# Altium PCB lab2_larionov_buck.PcbDoc
Units mm, origin at the board's own origin, x right, y up, seen from the top; angles counter-clockwise.
Board outline 72.5 x 30 mm, 2 copper layers (Top Layer, Bottom Layer), stack 1.57 mm thick; 36 components, 21 nets, 107 pads, 288 vias.
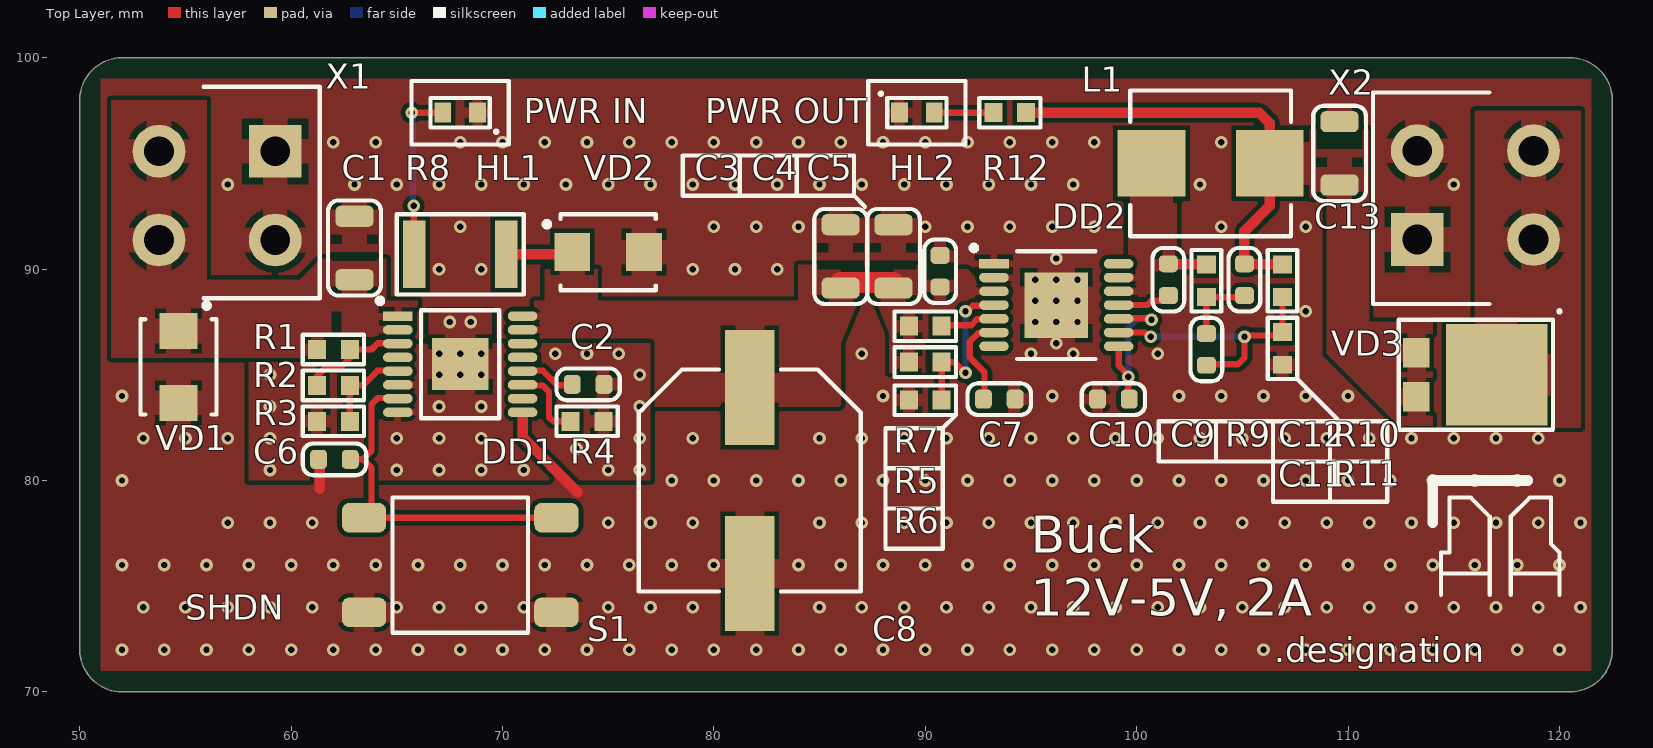
[diagram p0: Top Layer view]
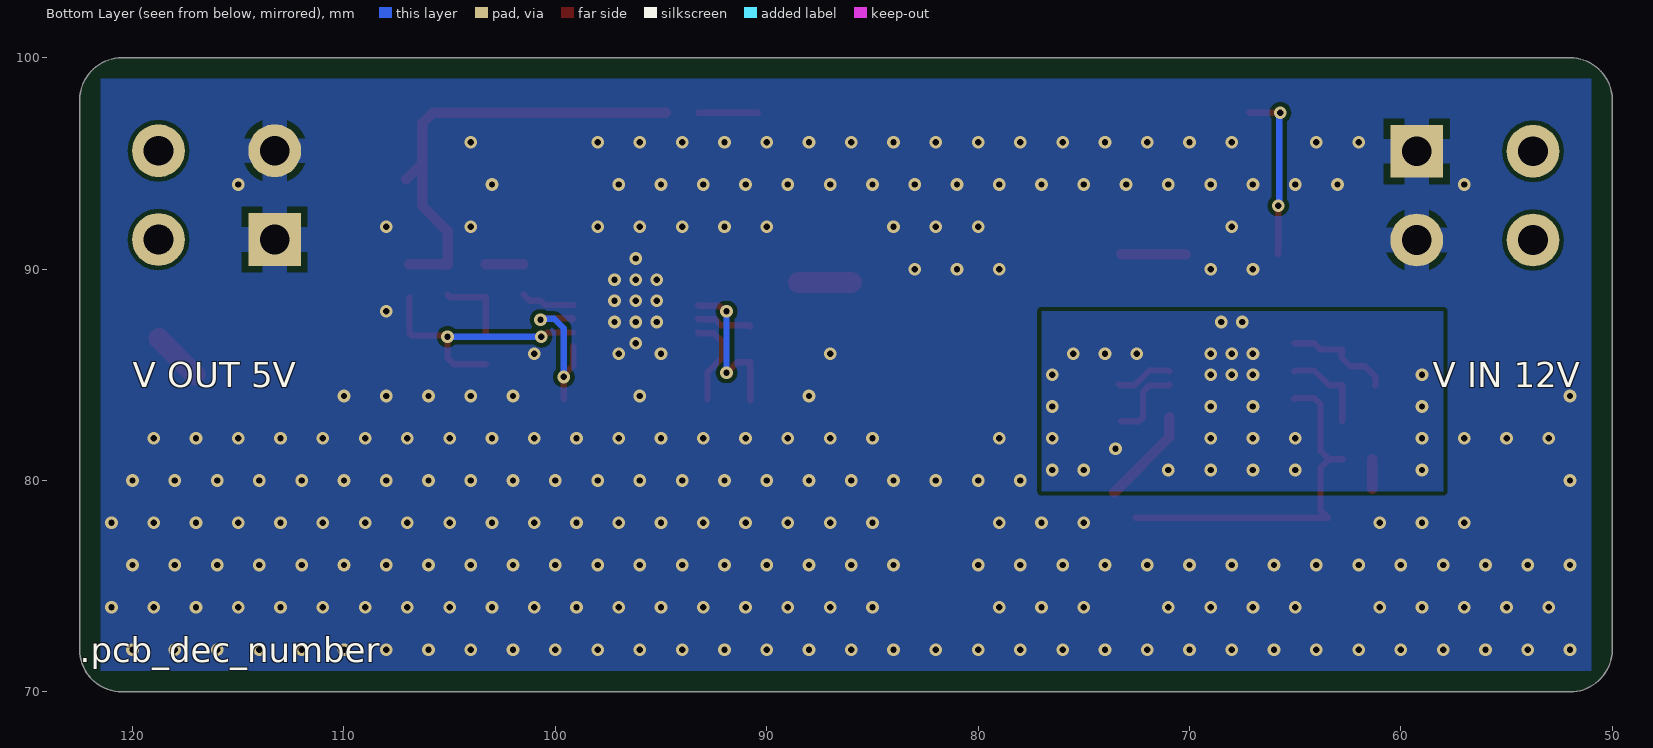
[diagram p1: Bottom Layer view, seen from below]

## Layer stack, top to bottom
Top Solder: solder mask 0.0102, Solder Resist, Dk 3.5
Top Layer: signal copper 0.035
Core 1: core 1.5, FR4, Dk 4.6
Bottom Layer: signal copper 0.035
Bottom Solder: solder mask 0.0102, Solder Resist, Dk 3.5

## Board outline
52,70 cw(c52,72) 50,72 50,98 cw(c52,98) 52,100 120.5,100 cw(c120.5,98) 122.5,98 122.5,72 cw(c120.5,72) 120.5,70

## Design rules (kind name [scope] priority, off if disabled: settings)
AcuteAngle min_acute_angle [OnCopper] p1: minimum=3.50000000000000E+0001 checktracksonly=FALSE // Минимальный угол между примитивами топологии
BoardOutlineClearance board_outline_clearance_std [NOT (OnLayer('Bottom Overlay') OR OnLayer('Top Overlay'))] p1: gap=0.25 ignorepadtopadclearanceinfootprint=FALSE except(0: Arc-SplitContinuation Track-SplitContinuation SMDPad-SplitContinuation THPad-SplitContinuation Via-SplitContinuation Fill-SplitContinuation Poly-SplitContinuation Region-SplitContinuation Text-SplitContinuation) // Отступ элементов топологии от края фрезеруемой печатной платы
Clearance clearance_outer_35um_std [OnTopLayer OR OnBottomLayer] p1: gap=0.2 ignorepadtopadclearanceinfootprint=TRUE except(0.25: Arc-Hole Track-Hole SMDPad-Hole THPad-Hole Via-Hole Fill-Hole Poly-Hole Region-Hole Text-Hole) // Зазоры на внешних слоях
Clearance clearance_inner_35um_std [NOT (OnTopLayer Or OnBottomLayer)] p2: gap=0.2 ignorepadtopadclearanceinfootprint=FALSE except(0.25: Arc-Hole Track-Hole SMDPad-Hole THPad-Hole Via-Hole Fill-Hole Poly-Hole Region-Hole Text-Hole) // Зазоры на внутренних слоях
ComponentClearance [All] p1: gap=0 collisioncheckmode=3 verticalgap=0 showdistances=FALSE
DiffPairsRouting diff_pairs_routing [All] p1: maxlimit=0.127 minlimit=0.127 mostfreqgap=0.127 toplayer_minwidth=0.143 toplayer_maxwidth=0.143 toplayer_prefwidth=0.143 bottomlayer_minwidth=0.143 bottomlayer_maxwidth=0.143 bottomlayer_prefwidth=0.143 impedanceprofiledriven=TRUE impedanceprofileid={FD46899E-B5A2-4EF5-A302-5D2DB6A51F35} maxuncoupledlength=12.7 // Правила трассировки дифференциальных пар
HoleSize min_hole_size_std [IsPad] p1: absolutevalues=TRUE maxlimit=5.9 minlimit=0.6 maxpercent=80.000 minpercent=20.000 // Диаметр межслойного переходного отверстия
HoleSize min_hole_size_via_std [IsVia] p2: absolutevalues=TRUE maxlimit=5.9 minlimit=0.3 maxpercent=80.000 minpercent=20.000 // Минимальный диаметр монтажного отверстия
HoleToHoleClearance hole_to_hole_clearance_std [All] p1: gap=0.2 allowstackedmicrovias=FALSE // Минимальное расстояние между краями двух отверстий
MinimumAnnularRing min_via_ar_std [All] p1: minimumring=0.15 // Поясок площадки переходного отверстия (Annular ring VIA)
MinimumAnnularRing min_pad_ar_std [All] p2: minimumring=0.2 // Поясок монтажной контактной площадки (Annular ring PAD)
MinimumSolderMaskSliver min_solder_mask_bridge_std [All] p1: minsoldermaskwidth=0.15 // Мнимальная ширина масочного мостика
PlaneClearance plane_clearance_35um_std [All] p1: clearance=0.2 // Отступ полигона (для слоя plane) от элементов топологии
PlaneConnect [All] p1: planeconnectstyle=Relief reliefexpansion=0.5 reliefentries=4 reliefconductorwidth=0.2 reliefairgap=0.2
PolygonConnect poly_connect_to_pad<=0.3 [(AsMM(PadXSize_AllLayers)<=0.301) or (AsMM(PadYSize_AllLayers)<=0.301)] p1: thpad.connectstyle=Relief thpad.reliefconductorwidth=0.2 thpad.reliefentries=4 thpad.polygonreliefangle="90 Angle" thpad.airgapwidth=0.2 smdpad.connectstyle=Relief smdpad.reliefconductorwidth=0.2 smdpad.reliefentries=4 smdpad.polygonreliefangle="90 Angle" smdpad.airgapwidth=0.2 via.connectstyle=Direct via.reliefconductorwidth=0.254 via.reliefentries=4 via.polygonreliefangle="90 Angle" via.airgapwidth=0.254 // Правила подключения полигонов для падов от 0,3мм и меньше
PolygonConnect poly_connect_to_pad<=0.4 [(AsMM(PadXSize_AllLayers)<=0.401) or (AsMM(PadYSize_AllLayers)<=0.401)] p2: thpad.connectstyle=Relief thpad.reliefconductorwidth=0.26 thpad.reliefentries=4 thpad.polygonreliefangle="90 Angle" thpad.airgapwidth=0.2 smdpad.connectstyle=Relief smdpad.reliefconductorwidth=0.26 smdpad.reliefentries=4 smdpad.polygonreliefangle="90 Angle" smdpad.airgapwidth=0.2 via.connectstyle=Direct via.reliefconductorwidth=0.254 via.reliefentries=4 via.polygonreliefangle="90 Angle" via.airgapwidth=0.254 // Правила подключения полигонов для падов от 0,4 и меньше
PolygonConnect poly_connect_to_pad<=0.6 [(AsMM(PadXSize_AllLayers)<=0.601) or (AsMM(PadYSize_AllLayers)<=0.601)] p3: thpad.connectstyle=Relief thpad.reliefconductorwidth=0.33 thpad.reliefentries=4 thpad.polygonreliefangle="90 Angle" thpad.airgapwidth=0.2 smdpad.connectstyle=Relief smdpad.reliefconductorwidth=0.33 smdpad.reliefentries=4 smdpad.polygonreliefangle="90 Angle" smdpad.airgapwidth=0.2 via.connectstyle=Direct via.reliefconductorwidth=0.254 via.reliefentries=4 via.polygonreliefangle="90 Angle" via.airgapwidth=0.254 // Правила подключения полигонов для падов от 0,6мм и меньше
PolygonConnect poly_connect_to_pad<=0.7 [(AsMM(PadXSize_AllLayers)<=0.701) or (AsMM(PadYSize_AllLayers)<=0.701)] p4: thpad.connectstyle=Relief thpad.reliefconductorwidth=0.46 thpad.reliefentries=4 thpad.polygonreliefangle="90 Angle" thpad.airgapwidth=0.2 smdpad.connectstyle=Relief smdpad.reliefconductorwidth=0.46 smdpad.reliefentries=4 smdpad.polygonreliefangle="90 Angle" smdpad.airgapwidth=0.2 via.connectstyle=Direct via.reliefconductorwidth=0.254 via.reliefentries=4 via.polygonreliefangle="90 Angle" via.airgapwidth=0.254 // Правила подключения полигонов для падов от 0,7мм и меньше
PolygonConnect poly_connect_to_pad<=0.8 [(AsMM(PadXSize_AllLayers)<=0.8)or(AsMM(PadYSize_AllLayers)<=0.8)] p5: thpad.connectstyle=Relief thpad.reliefconductorwidth=0.53 thpad.reliefentries=4 thpad.polygonreliefangle="90 Angle" thpad.airgapwidth=0.3 smdpad.connectstyle=Relief smdpad.reliefconductorwidth=0.53 smdpad.reliefentries=4 smdpad.polygonreliefangle="90 Angle" smdpad.airgapwidth=0.2 via.connectstyle=Direct via.reliefconductorwidth=0.254 via.reliefentries=4 via.polygonreliefangle="90 Angle" via.airgapwidth=0.254 // Правила подключения полигонов для падов от 0,8мм и меньше
PolygonConnect poly_connect_to_pad<=1 [(AsMM(PadXSize_AllLayers)<=1.01)or(AsMM(PadYSize_AllLayers)<=1.01)] p6: thpad.connectstyle=Relief thpad.reliefconductorwidth=0.6 thpad.reliefentries=4 thpad.polygonreliefangle="90 Angle" thpad.airgapwidth=0.3 smdpad.connectstyle=Relief smdpad.reliefconductorwidth=0.6 smdpad.reliefentries=4 smdpad.polygonreliefangle="90 Angle" smdpad.airgapwidth=0.2 via.connectstyle=Direct via.reliefconductorwidth=0.254 via.reliefentries=4 via.polygonreliefangle="90 Angle" via.airgapwidth=0.254 // Правила подключения полигонов для падов от 1мм и меньше
PolygonConnect poly_connect_to_pad<=1.3 [(AsMM(PadXSize_AllLayers)<=1.31)or(AsMM(PadYSize_AllLayers)<=1.31)] p7: thpad.connectstyle=Relief thpad.reliefconductorwidth=0.66 thpad.reliefentries=4 thpad.polygonreliefangle="90 Angle" thpad.airgapwidth=0.3 smdpad.connectstyle=Relief smdpad.reliefconductorwidth=0.86 smdpad.reliefentries=4 smdpad.polygonreliefangle="90 Angle" smdpad.airgapwidth=0.2 via.connectstyle=Direct via.reliefconductorwidth=0.254 via.reliefentries=4 via.polygonreliefangle="90 Angle" via.airgapwidth=0.254 // Правила подключения полигонов для падов от 1,3мм и меньше
PolygonConnect poly_connect_to_pad<=1.6 [(AsMM(PadXSize_AllLayers)<=1.61)or(AsMM(PadYSize_AllLayers)<=1.61)] p8: thpad.connectstyle=Relief thpad.reliefconductorwidth=0.8 thpad.reliefentries=4 thpad.polygonreliefangle="90 Angle" thpad.airgapwidth=0.3 smdpad.connectstyle=Relief smdpad.reliefconductorwidth=1 smdpad.reliefentries=4 smdpad.polygonreliefangle="90 Angle" smdpad.airgapwidth=0.2 via.connectstyle=Direct via.reliefconductorwidth=0.254 via.reliefentries=4 via.polygonreliefangle="90 Angle" via.airgapwidth=0.254 // Правила подключения полигонов для падов от 1,6мм и меньше
PolygonConnect poly_connect_to_pad<=1.8 [(AsMM(PadXSize_AllLayers)<=1.8)or(AsMM(PadYSize_AllLayers)<=1.8)] p9: thpad.connectstyle=Relief thpad.reliefconductorwidth=1 thpad.reliefentries=4 thpad.polygonreliefangle="90 Angle" thpad.airgapwidth=0.3 smdpad.connectstyle=Relief smdpad.reliefconductorwidth=1.2 smdpad.reliefentries=4 smdpad.polygonreliefangle="90 Angle" smdpad.airgapwidth=0.2 via.connectstyle=Direct via.reliefconductorwidth=0.254 via.reliefentries=4 via.polygonreliefangle="90 Angle" via.airgapwidth=0.254 // Правила подключения полигонов для падов от 1,8мм и меньше
PolygonConnect poly_connect_to_pad<=2 [(AsMM(PadXSize_AllLayers)<=2.01)or(AsMM(PadYSize_AllLayers)<=2.01)] p10: thpad.connectstyle=Relief thpad.reliefconductorwidth=1.1 thpad.reliefentries=4 thpad.polygonreliefangle="90 Angle" thpad.airgapwidth=0.3 smdpad.connectstyle=Relief smdpad.reliefconductorwidth=1.4 smdpad.reliefentries=4 smdpad.polygonreliefangle="90 Angle" smdpad.airgapwidth=0.2 via.connectstyle=Direct via.reliefconductorwidth=0.254 via.reliefentries=4 via.polygonreliefangle="90 Angle" via.airgapwidth=0.254 // Правила подключения полигонов для падов от 2мм и меньше
PolygonConnect poly_connect_to_pad<=2.3 [(AsMM(PadXSize_AllLayers)<=2.31)or(AsMM(PadYSize_AllLayers)<=2.31)] p11: thpad.connectstyle=Relief thpad.reliefconductorwidth=1.2 thpad.reliefentries=4 thpad.polygonreliefangle="90 Angle" thpad.airgapwidth=0.3 smdpad.connectstyle=Relief smdpad.reliefconductorwidth=1.4 smdpad.reliefentries=4 smdpad.polygonreliefangle="90 Angle" smdpad.airgapwidth=0.2 via.connectstyle=Direct via.reliefconductorwidth=0.254 via.reliefentries=4 via.polygonreliefangle="90 Angle" via.airgapwidth=0.254 // Правила подключения полигонов для падов от 2,3мм и меньше
PolygonConnect poly_connect_to_pad<=2.5 [(AsMM(PadXSize_AllLayers)<=2.51)or(AsMM(PadYSize_AllLayers)<=2.51)] p12: thpad.connectstyle=Relief thpad.reliefconductorwidth=1.2 thpad.reliefentries=4 thpad.polygonreliefangle="90 Angle" thpad.airgapwidth=0.3 smdpad.connectstyle=Relief smdpad.reliefconductorwidth=1.4 smdpad.reliefentries=4 smdpad.polygonreliefangle="90 Angle" smdpad.airgapwidth=0.2 via.connectstyle=Direct via.reliefconductorwidth=0.254 via.reliefentries=4 via.polygonreliefangle="90 Angle" via.airgapwidth=0.254 // Правила подключения полигонов для падов от 2,5мм и меньше
PolygonConnect poly_connect_to_pad<=2.7 [(AsMM(PadXSize_AllLayers)<=2.71)or(AsMM(PadYSize_AllLayers)<=2.71)] p13: thpad.connectstyle=Relief thpad.reliefconductorwidth=1.4 thpad.reliefentries=4 thpad.polygonreliefangle="90 Angle" thpad.airgapwidth=0.3 smdpad.connectstyle=Relief smdpad.reliefconductorwidth=1.6 smdpad.reliefentries=4 smdpad.polygonreliefangle="90 Angle" smdpad.airgapwidth=0.2 via.connectstyle=Direct via.reliefconductorwidth=0.254 via.reliefentries=4 via.polygonreliefangle="90 Angle" via.airgapwidth=0.254 // Правила подключения полигонов для падов от 2,7мм и меньше
PolygonConnect poly_connect_to_pad<=3 [(AsMM(PadXSize_AllLayers)<=3.01)or(AsMM(PadYSize_AllLayers)<=3.01)] p14: thpad.connectstyle=Relief thpad.reliefconductorwidth=1.6 thpad.reliefentries=4 thpad.polygonreliefangle="90 Angle" thpad.airgapwidth=0.3 smdpad.connectstyle=Relief smdpad.reliefconductorwidth=1.8 smdpad.reliefentries=4 smdpad.polygonreliefangle="90 Angle" smdpad.airgapwidth=0.2 via.connectstyle=Direct via.reliefconductorwidth=0.254 via.reliefentries=4 via.polygonreliefangle="90 Angle" via.airgapwidth=0.254 // Правила подключения полигонов для падов от 3мм и меньше
PolygonConnect poly_connect_to_pad<=7 [(AsMM(PadXSize_AllLayers)<7.01)or(AsMM(PadYSize_AllLayers)<=7.01)] p15: thpad.connectstyle=Relief thpad.reliefconductorwidth=2 thpad.reliefentries=4 thpad.polygonreliefangle="90 Angle" thpad.airgapwidth=0.4 smdpad.connectstyle=Relief smdpad.reliefconductorwidth=2 smdpad.reliefentries=4 smdpad.polygonreliefangle="90 Angle" smdpad.airgapwidth=0.3 via.connectstyle=Direct via.reliefconductorwidth=0.254 via.reliefentries=4 via.polygonreliefangle="90 Angle" via.airgapwidth=0.254 // Правила подключения полигонов для падов от 7мм и меньше
PolygonConnect poly_connect_to_pad [All] p16: thpad.connectstyle=Relief thpad.reliefconductorwidth=0.25 thpad.reliefentries=4 thpad.polygonreliefangle="90 Angle" thpad.airgapwidth=0.2 smdpad.connectstyle=Relief smdpad.reliefconductorwidth=0.25 smdpad.reliefentries=4 smdpad.polygonreliefangle="90 Angle" smdpad.airgapwidth=0.2 via.connectstyle=Direct via.reliefconductorwidth=0.25 via.reliefentries=4 via.polygonreliefangle="90 Angle" via.airgapwidth=0.2 // Правила подключения полигонов общие
RoutingCorners [All] p1 off: cornerstyle=45-Degree minsetback=2.5 maxsetback=2.5
RoutingVias [All] p1: holewidth=0.3 width=0.6 viastyle="Through Hole" minholewidth=0.3 minwidth=0.6 maxholewidth=5.9 maxwidth=6.4
SilkToSilkClearance silk_to_silk_clearance_std [All] p1 off: silktosilkclearance=0.15 // Отступ текста шелкографии от других примитивов шелкографии
SilkToSolderMaskClearance silk_to_solder_mask_clearance_std [IsPad] p1 off: minsilkscreentomaskgap=0.15 clearancetoexposedcopper=FALSE // Минимальное расстояние между элементами шелкографии и вскрытой медью
SolderMaskExpansion solder_mask_expansion_std [All] p1: expansion=0.05 // Припуск паяльной масски
UnRoutedNet [All] p1: checkbadconnections=TRUE
Width width_35um_std [All] p1: maxlimit=10 minlimit=0.2 preferedwidth=0.2 checkconnectedcopper=TRUE // Ширина проводников (общая)
19 further rules are at their usual default settings.

## Components (designator, comment, footprint, x,y, rotation, side; value= is the part's Value field where it differs from the comment)
C1 "1 мк" C1206 63,91 r90 top
C2 "82" C0603 74.05,84.55 r0 top
C3 "2,2 мк" C1206 86,90.6 r90 top
C4 "2,2 мк" C1206 88.5,90.6 r90 top
C5 "0,1 мк" C0603 90.7,89.9 r90 top
C6 "0,1 мк" C0603 62.05,81 r180 top
C7 "0,033 мк" C0603 93.5,83.85 r0 top
C8 "47 мк" CAPAE-1000X1000X1200 81.7,80 r270 top
C9 "0,01 мк" C0603 101.5,89.5 r90 top
C10 "1 мк" C0603 98.9,83.85 r180 top
C11 "0,01 мк" C0603 103.3,86.2 r270 top
C12 "2700" C0603 105.1,89.5 r270 top
C13 "22 мк" C1206 109.6,95.475 r90 top
DD1 "TPS26600PWPR" HTSSOP-16 68,85.5 r0 top
DD2 "LM5160QPWPRQ1" HTSSOP-14 96.2,88.3 r0 top
HL1 "TLMG1100-GS08" HL0603 68,97.4 r180 top
HL2 "TLMS1000-GS08" HL0603 89.6,97.4 r0 top
L1 "SRP7028A-220M" SRP-2-670X660X280 103.5,95 r0 top
R1 "523 к" R0603 62,86.2 r180 top
R2 "26,7 к" R0603 62,84.5 r180 top
R3 "44,2 к" R0603 62,82.8 r0 top
R4 "6,04 к" R0603 74,82.8 r180 top
R5 "19,1 к" R0603 90,85.6 r180 top
R6 "127 к" R0603 90,83.8 r0 top
R7 "165 к" R0603 90,87.3 r180 top
R8 "1 к" R1218 68,90.7 r0 top
R9 "57,6 к" R0603 103.3,89.45 r270 top
R10 "3 к" R0603 106.9,89.45 r90 top
R11 "2 к" R0603 106.9,86.25 r90 top
R12 "220" R0603 94,97.4 r0 top
S1 "FSM4JSMA" FSM4JSMA 68,76 r0 top
VD1 "1.5SMC62CA" DO-214AB 54.675,85.375 r270 top
VD2 "SL13-E3/5AT" DO-214AC 75,90.8 r0 top
VD3 "SS3P4L-M3/87A" TO-277A 116,85 r0 top
X1 "4-1775099-0" 4-1775099-0 55.85,93.625 r270 top
X2 "4-1775099-0" 4-1775099-0 116.675,93.35 r90 top

## Footprints (in the part's own frame and the unit in brackets; to place one, negate y for a bottom-side part, rotate by r counter-clockwise, add the part's x,y. Pads: shape width x height; smd on the part's side, far side on the other; paste and mask are expansions set on the pad)
4-1775099-0 [mm]
  rect 2.5x2.5 hole 1.4: 1(-1.95,3.4)
  round 2.5 hole 1.4: 2(2.25,3.4) 3(-1.95,-2.1) 4(2.25,-2.1)
  silkscreen extent -5,0 5,5.5, body extent -4.95,-5.45 4.9,5.45, height 12.8
C0603 [mm] "Chip Capacitor, 2-Leads, Body 1,60x0,80mm, IPC Medium Density"
  rrect50% 0.8x0.9 smd: 1(-0.75,0) 2(0.75,0)
  silkscreen extent -1.5,-0.75 1.5,0.75, body extent -0.8,-0.4 0.8,0.4, height 0.8
C1206 [mm] "Chip Capacitor, 2-Leads, Body 3,20x1,60mm, IPC Medium Density"
  rrect50% 1x1.8 smd: 1(-1.5,0) 2(1.5,0)
  silkscreen extent -2.25,-1.25 2.25,1.25, body extent -1.6,-0.8 1.6,0.8, height 0.78
CAPAE-1000X1000X1200 [mm] "Aluminum Electrolytic Capacitor, Body 10,50x10,50x12,50mm, IPC Low Density"
  rect 5.45x2.35 smd: 1(-4.4,0) 2(4.4,0)
  silkscreen extent -5.25,-5.25 5.25,5.25, body extent -6.05,-5.25 6.05,5.25, height 12.5
DO-214AB [mm] "Molded Diode, 2-Leads, Body 6,86x5,91mm, IPC Medium Density"
  rect 1.7x1.8 smd: 1(-1.7,0) 2(1.7,0)
  silkscreen extent -3.02,-1.8 2.25,1.8, body extent -2.7,-1.81 2.7,1.81, height 2.43
DO-214AC [mm] "Molded Diode, 2-Leads, Body 4,25x2,67mm, IPC Medium Density"
  rect 1.7x1.8 smd: 1(-1.7,0) 2(1.7,0)
  silkscreen extent -3.02,-1.8 2.25,1.8, body extent -2.7,-1.81 2.7,1.81, height 2.43
FSM4JSMA [mm]
  rrect50% 2.1x1.4 smd: 1(-4.55,2.24) 1(4.55,2.24) 2(-4.55,-2.24) 2(4.55,-2.24)
  silkscreen extent -3.2,-3.2 3.2,3.2, body extent -5,-3 5,3, height 5.13
HL0603 [mm] "Chip Diode, 2-Leads, Body 1,60x0,80mm, IPC Medium Density"
  rect 0.8x0.95 smd: 1(-0.825,0) 2(0.825,0)
  silkscreen extent -1.75,-0.7 1.4,0.95, body extent -0.81,-0.4 0.81,0.4, height 0.6
HTSSOP-14 [mm] "TSOP, 14-Leads, Body 5,00x4,40mm, Pitch 0,65mm, Thermal Pad 3,10x3,00mm, IPC Medium Density"
  rect 3x3.1 smd: 0(0,0)
  rect 1.4x0.45 smd: 1(-2.95,1.95)
  oval 1.4x0.45 smd: 2(-2.95,1.3) 3(-2.95,0.65) 4(-2.95,0) 5(-2.95,-0.65) 6(-2.95,-1.3) 7(-2.95,-1.95) 8(2.95,-1.95) 9(2.95,-1.3) 10(2.95,-0.65) 11(2.95,0) 12(2.95,0.65) 13(2.95,1.3) 14(2.95,1.95)
  silkscreen extent -4.02,-2.55 1.85,2.82, body extent -3.2,-2.5 3.2,2.5, height 1.2
HTSSOP-16 [mm] "TSOP, 16-Leads, Body 5,00x4,40mm, Pitch 0,65mm, Thermal Pad 2,46x2,66mm, IPC Medium Density"
  rect 2.66x2.46 smd: 0(0,0)
  rect 1.4x0.45 smd: 1(-2.95,2.275)
  oval 1.4x0.45 smd: 2(-2.95,1.625) 3(-2.95,0.975) 4(-2.95,0.325) 5(-2.95,-0.325) 6(-2.95,-0.975) 7(-2.95,-1.625) 8(-2.95,-2.275) 9(2.95,-2.275) 10(2.95,-1.625) 11(2.95,-0.975) 12(2.95,-0.325) 13(2.95,0.325) 14(2.95,0.975) 15(2.95,1.625) 16(2.95,2.275)
  silkscreen extent -3.92,-2.55 1.85,3.12, body extent -3.2,-2.5 3.2,2.5, height 1.2
R0603 [mm] "Chip Resistor, 2-Leads, Body 1,60x0,80mm, IPC Medium Density"
  rect 0.85x0.9 smd: 1(-0.775,0) 2(0.775,0)
  silkscreen extent -1.45,-0.7 1.45,0.7, body extent -0.8,-0.4 0.8,0.4, height 0.45
R1218 [mm] "Chip Resistor, 2-Leads, Body 4,60x3,10mm, IPC Medium Density"
  rect 1.05x3.2 smd: 1(-2.175,0) 2(2.175,0)
  silkscreen extent -3,-1.9 3,1.9, body extent -2.35,-1.6 2.35,1.6, height 0.65
SRP-2-670X660X280 [mm] "Precision Wire Wound Inductor, 2-Leads, Body 7,30x6,60mm, IPC Medium Density"
  rect 3.2x3.15 smd: 1(-2.8,0) 2(2.8,0)
  silkscreen extent -3.8,-3.45 3.8,3.45, body extent -3.7,-3.3 3.7,3.3, height 3
TO-277A [mm] "DFN, 3-Leads, Body 4,30x6,10mm, Pitch 3,81mm, IPC Medium Density"
  rect 4.8x4.8 smd: 1(1.04,0)
  rect 1.25x1.4 smd: 2(-2.765,-1.04) 2(-2.765,1.04)
  silkscreen extent -3.6,-2.6 4.05,3.05, body extent -3.21,-2.3 3.29,2.3, height 1.05

## Part data
C1: library part c0068, "=Описание", HelpURL=https://www.yageo.com/upload/media/product/productsearch/datasheet/mlcc/UPY-NP0X7R_MV_100-to-630V_22.pdf, ID=c0068, Корпус=1206, Наименование=CC1206KKX7R0BB105, Напряжение="100 В", Номинал="1 мк", Номинальное напряжение="100 В", Описание="Конденсатор чип 1206 1 мкФ 100 В ±10 %", Отклонение="±10 %", Производитель="YAGEO Corp.", Рабочие температуры="от –55 °С до +125 °С", Температурный коэффициент емкости=X7R, Фамилия=Ларионов
C2: library part c0011, "=Описание", HelpURL=https://www.yageo.com/upload/media/product/productsearch/datasheet/mlcc/UPY-GP_NP0_16V-to-50V_18.pdf, ID=c0011, Корпус=0603, Наименование=CC0603JRNPO7BN820, Напряжение="16 В", Номинал=82, Номинальное напряжение="16 В", Описание="Конденсатор чип 0603 82 пФ 16 В ±5 %", Отклонение="±5 %", Производитель="YAGEO Corp.", Рабочие температуры="от –55 °С до +125 °С", Температурный коэффициент емкости=C0G, Фамилия=Ларионов
C3 C4: library part c0078, "=Описание", HelpURL=https://www.yageo.com/upload/media/product/productsearch/datasheet/mlcc/UPY-NP0X7R_MV_100-to-630V_22.pdf, ID=c0078, Корпус=1206, Наименование=CC1206KKX7R0BB225, Напряжение="100 В", Номинал="2,2 мк", Номинальное напряжение="100 В", Описание="Конденсатор чип 1206 2,2 мкФ 100 В ±10 %", Отклонение="±10 %", Производитель="YAGEO Corp.", Рабочие температуры="от –55 °С до +125 °С", Температурный коэффициент емкости=X7R, Фамилия=Ларионов
C5 C6: library part c0038, "=Описание", HelpURL=https://www.yageo.com/upload/media/product/productsearch/datasheet/mlcc/UPY-NP0X7R_MV_100-to-630V_22.pdf, ID=c0038, Корпус=0603, Наименование=CC0603KRX7R0BB104, Напряжение="100 В", Номинал="0,1 мк", Номинальное напряжение="100 В", Описание="Конденсатор чип 0603 100 нФ 100 В ±10 %", Отклонение="±10 %", Производитель="YAGEO Corp.", Рабочие температуры="от –55 °С до +125 °С", Температурный коэффициент емкости=X7R, Фамилия=Ларионов
C7: library part c0027, "=Описание", HelpURL=https://www.yageo.com/upload/media/product/productsearch/datasheet/mlcc/UPY-GPHC_X7R_6.3V-to-50V_20.pdf, ID=c0027, Корпус=0603, Наименование=CC0603JPX7R7BB333, Напряжение="16 В", Номинал="0,033 мк", Номинальное напряжение="16 В", Описание="Конденсатор чип 0603 33 нФ 16 В ±5 %", Отклонение="±5 %", Производитель="YAGEO Corp.", Рабочие температуры="от –55 °С до +125 °С", Температурный коэффициент емкости=X7R, Фамилия=Ларионов
C8: library part c0118, "=Описание", HelpURL=https://www.vishay.com/capacitors/list/product-28403/, ID=c0118, Корпус="CAPAE (10 x 10 x 12)", Наименование=MAL214699904E3, Напряжение="100 В", Номинал="47 мк", Номинальное напряжение="100 В", Описание="Конденсатор электролитический 47 мкФ 100 В ±20 %", Отклонение="±20 %", Производитель="Vishay Intertechnology, Inc.", Рабочие температуры="от –55 °С до +125 °С", Температурный коэффициент емкости=-, Фамилия=Ларионов
C9 C11: library part c0022, "=Описание", HelpURL=https://www.yageo.com/upload/media/product/productsearch/datasheet/mlcc/UPY-NP0X7R_MV_100-to-630V_22.pdf, ID=c0022, Корпус=0603, Наименование=CC0603JRX7R0BB103, Напряжение="100 В", Номинал="0,01 мк", Номинальное напряжение="100 В", Описание="Конденсатор чип 0603 10 нФ 100 В ±5 %", Отклонение="±5 %", Производитель="YAGEO Corp.", Рабочие температуры="от –55 °С до +125 °С", Температурный коэффициент емкости=X7R, Фамилия=Ларионов
C10: library part c0017, "=Описание", HelpURL=https://www.yageo.com/upload/media/product/products/datasheet/mlcc/UPY-GPHC_X7R_6.3V-to-50V_20.pdf, ID=c0017, Корпус=0603, Наименование=CC0603KRX7R8BB105, Напряжение="25 В", Номинал="1 мк", Номинальное напряжение="25 В", Описание="Конденсатор чип 0603 1 мкФ 25 В ±10 %", Отклонение="±10 %", Производитель="YAGEO Corp.", Рабочие температуры="от -55 °С до +125 °С", Фамилия=Ларионов
C12: library part c0021, "=Описание", HelpURL=https://www.yageo.com/upload/media/product/products/datasheet/mlcc/UPY-GPHC_X7R_6.3V-to-50V_20.pdf, ID=c0021, Корпус=0603, Наименование=CC0603KRX7R0BB272, Напряжение="100 В", Номинал=2700, Номинальное напряжение="100 В", Описание="Конденсатор чип 0603 2,7 нФ 100 В ±10 %", Отклонение="±10 %", Производитель="YAGEO Corp.", Рабочие температуры="от –55 °С до +125 °С", Температурный коэффициент емкости=X7R, Фамилия=Ларионов
C13: library part c0106, "=Описание", HelpURL=https://www.yageo.com/upload/media/product/productsearch/datasheet/mlcc/UPY-GPHC_X7R_6.3V-to-50V_20.pdf, ID=c0106, Корпус=1206, Наименование=CC1206MKX7R7BB226, Напряжение="16 В", Номинал="22 мк", Номинальное напряжение="16 В", Описание="Конденсатор чип 1206 22 мкФ 16 В ±20 %", Отклонение="±20 %", Производитель="YAGEO Corp.", Рабочие температуры="от –55 °С до +125 °С", Температурный коэффициент емкости=X7R, Фамилия=Ларионов
DD1: library part dd0001, "=Описание", HelpURL=https://www.ti.com/product/TPS2660, ID=dd0001, Корпус=HTSSOP-16, Максимальное напряжение="62 В", Наименование=TPS26600PWPR, Напряжение="от 4,2 В до 60 В", Описание="Защитная микросхема eFuse 60 В и 2 А", Производитель="Texas Instruments", Рабочие температуры="от -40 °С до +125 °С", Ток="от 0,1 А до 2,23 А", Фамилия=Ларионов
DD2: library part dd0003, "=Описание", HelpURL=https://www.ti.com/product/LM5160-Q1, ID=dd0003, Входное напряжение="от 4,5 В до 65 В", Выходное напряжение="не указано", Коммутируемый ток="до 2 А", Корпус=HTSSOP-14, Наименование=LM5160QPWPRQ1, Описание="Понижающий преобразователь напряжения 65 В и 2 А", Производитель="Texas Instruments", Рабочие температуры="от -40 °С до +125 °С", Фамилия=Ларионов, Частота переключения="до 1 МГц"
HL1: library part hl0005, "=Описание", HelpURL=https://www.vishay.com/leds/list/product-83173/, ID=hl0005, Корпус=0603, Наименование=TLMG1100-GS08, Номинальная длина волны="570 нм", Номинальная сила света="35 мкд", Номинальное падение напряжения="2,1 В", Номинальный прямой ток="30 мА", Описание="Светодиод чип 0603 зеленый", Производитель="Vishay Intertechnology, Inc.", Рабочие температуры="от -40 °С до +100 °С", Рассеиваемая мощность="90 мВт", Фамилия=Ларионов, Цвет=Green
HL2: library part hl0001, "=Описание", HelpURL=https://www.vishay.com/leds/list/product-83172/, ID=hl0001, Корпус=0603, Наименование=TLMS1000-GS08, Номинальная длина волны="628 нм", Номинальная сила света="4 мкд", Номинальное падение напряжения="1,8 В", Номинальный прямой ток="15 мА", Описание="Светодиод чип 0603 красный", Производитель="Vishay Intertechnology, Inc.", Рабочие температуры="от -40 °С до +100 °С", Рассеиваемая мощность="40 мВт", Фамилия=Ларионов, Цвет=Red
L1: library part l0006, "=Описание", HelpURL=https://www.bourns.com/products/magnetic-products/power-inductors-aec-q200-compliant/product/SRP7028A, ID=l0006, Индуктивность="22 мкГн", Корпус="6,7 x 6,6 x 2,8", Максимальное активное сопротивление="190 мОм", Наименование=SRP7028A-220M, Номинал="22 мкГн", Номинальное активное сопротивление="165 мОм", Номинальный ток (при нагреве на 20 °С/40 °С)="2 А", Описание="Катушка индуктивности 22 мкГн ±20 %", Отклонение="±20 %", Производитель="Bourns, Inc.", Рабочее напряжение="не указано", Рабочие температуры="от –55 °С до +150 °С", Резонансная частота="10 МГц", Ток насыщения="3,5 А", Фамилия=Ларионов
R1: library part r0032, "=Описание", HelpURL=https://www.yageo.com/upload/media/product/productsearch/datasheet/rchip/PYu-RC_Group_51_RoHS_L_11.pdf, ID=r0032, Корпус=0603, Наименование=RC0603FR-07523KL, Номинал="523 к", Номинальное напряжение="75 В", Номинальный ток="1 А", Описание="Резистор чип 0603 523 кОм ±1 % 0,1 Вт", Отклонение="±1 %", Производитель="YAGEO Corp.", Рабочие температуры="от -55 °С до +155 °С", Фамилия=Жернаков
R2: library part r0022, "=Описание", HelpURL=https://www.yageo.com/upload/media/product/productsearch/datasheet/rchip/PYu-RC_Group_51_RoHS_L_11.pdf, ID=r0022, Корпус=0603, Наименование=RC0603FR-0726K7L, Номинал="26,7 к", Номинальное напряжение="75 В", Номинальный ток="1 А", Описание="Резистор чип 0603 26,7 кОм ±1 % 0,1 Вт", Отклонение="±1 %", Производитель="YAGEO Corp.", Рабочие температуры="от -55 °С до +155 °С", Фамилия=Ларионов
R3: library part r0023, "=Описание", HelpURL=https://www.yageo.com/upload/media/product/productsearch/datasheet/rchip/PYu-RC_Group_51_RoHS_L_11.pdf, ID=r0023, Корпус=0603, Наименование=RC0603FR-0744K2L, Номинал="44,2 к", Номинальное напряжение="75 В", Номинальный ток="1 А", Описание="Резистор чип 0603 44,2 кОм ±1 % 0,1 Вт", Отклонение="±1 %", Производитель="YAGEO Corp.", Рабочие температуры="от -55 °С до +155 °С", Фамилия=Ларионов
R4: library part r0015, "=Описание", HelpURL=https://www.yageo.com/upload/media/product/productsearch/datasheet/rchip/PYu-RC_Group_51_RoHS_L_11.pdf, ID=r0015, Корпус=0603, Наименование=RC0603FR-076K04L, Номинал="6,04 к", Номинальное напряжение="75 В", Номинальный ток="1 А", Описание="Резистор чип 0603 6,04 кОм ±1 % 0,1 Вт", Отклонение="±1 %", Производитель="YAGEO Corp.", Рабочие температуры="от -55 °С до +155 °С", Фамилия=Ларионов
R5: library part r0020, "=Описание", HelpURL=https://www.yageo.com/upload/media/product/productsearch/datasheet/rchip/PYu-RC_Group_51_RoHS_L_11.pdf, ID=r0020, Корпус=0603, Наименование=RC0603FR-0719K1L, Номинал="19,1 к", Номинальное напряжение="75 В", Номинальный ток="1 А", Описание="Резистор чип 0603 19,1 кОм ±1 % 0,1 Вт", Отклонение="±1 %", Производитель="YAGEO Corp.", Рабочие температуры="от -55 °С до +155 °С", Фамилия=Ларионов
R6: library part r0028, "=Описание", HelpURL=https://www.yageo.com/upload/media/product/productsearch/datasheet/rchip/PYu-RC_Group_51_RoHS_L_11.pdf, ID=r0028, Корпус=0603, Наименование=RC0603FR-07127KL, Номинал="127 к", Номинальное напряжение="75 В", Номинальный ток="1 А", Описание="Резистор чип 0603 127 кОм ±1 % 0,1 Вт", Отклонение="±1 %", Производитель="YAGEO Corp.", Рабочие температуры="от -55 °С до +155 °С", Фамилия=Ларионов
R7: library part r0030, "=Описание", HelpURL=https://www.yageo.com/upload/media/product/productsearch/datasheet/rchip/PYu-RC_Group_51_RoHS_L_11.pdf, ID=r0030, Корпус=0603, Наименование=RC0603FR-07165KL, Номинал="165 к", Номинальное напряжение="75 В", Номинальный ток="1 А", Описание="Резистор чип 0603 165 кОм ±1 % 0,1 Вт", Отклонение="±1 %", Производитель="YAGEO Corp.", Рабочие температуры="от -55 °С до +155 °С", Фамилия=Ларионов
R8: library part r0012, "=Описание", HelpURL=https://www.yageo.com/upload/media/product/productsearch/datasheet/rchip/PYu-AA_51_RoHS_L_3.pdf, ID=r0012, Корпус=1218, Наименование=AA1218FK-071KL, Номинал="1 к", Номинальное напряжение="200 В", Номинальный ток="6 А", Описание="Резистор чип 1218 1 кОм ±1 % 1 Вт", Отклонение="±1 %", Производитель="YAGEO Corp.", Рабочие температуры="от -55 °С до +155 °С", Фамилия=Ларионов
R9: library part r0025, "=Описание", HelpURL=https://www.yageo.com/upload/media/product/productsearch/datasheet/rchip/PYu-RC_Group_51_RoHS_L_11.pdf, ID=r0025, Корпус=0603, Наименование=RC0603FR-0757K6L, Номинал="57,6 к", Номинальное напряжение="75 В", Номинальный ток="1 А", Описание="Резистор чип 0603 57,6 кОм ±1 % 0,1 Вт", Отклонение="±1 %", Производитель="YAGEO Corp.", Рабочие температуры="от -55 °С до +155 °С", Фамилия=Ларионов
R10 R11: library part r0013, "=Описание", HelpURL=https://www.yageo.com/upload/media/product/productsearch/datasheet/rchip/PYu-RC_Group_51_RoHS_L_11.pdf, ID=r0013, Корпус=0603, Номинальное напряжение="75 В", Номинальный ток="1 А", Отклонение="±1 %", Производитель="YAGEO Corp.", Рабочие температуры="от -55 °С до +155 °С", Фамилия=Ларионов
  R10: Наименование=RC0603FR-073KL, Номинал="3 к", Описание="Резистор чип 0603 3 кОм ±1 % 0,1 Вт"
  R11: Наименование=RC0603FR-072KL, Номинал="2 к", Описание="Резистор чип 0603 2 кОм ±1 % 0,1 Вт"
R12: library part r0009, "=Описание", HelpURL=https://www.yageo.com/upload/media/product/productsearch/datasheet/rchip/PYu-RC_Group_51_RoHS_L_11.pdf, ID=r0009, Корпус=0603, Наименование=RC0603FR-07220RL, Номинал=220, Номинальное напряжение="75 В", Номинальный ток="1 А", Описание="Резистор чип 0603 220 Ом ±1 % 0,1 Вт", Отклонение="±1 %", Производитель="YAGEO Corp.", Рабочие температуры="от -55 °С до +155 °С", Фамилия=Ларионов
S1: library part sw0002, "=Описание", HelpURL=https://www.te.com/usa-en/product-4-1437565-1.html, ID=sw0002, Количество контактов=1, Корпус=6,00x6,00x4,98, Наименование=FSM4JSMA, Описание="Тактовая кнопка поверхностного монтажа", Производитель="TE Connectivity", Промывка=Разрешена, Рабочие температуры="от -35 °С до +85 °С", Сопротивление контакта="100 мОм", Ток нагрузки="50 мА @ 24 В", Фамилия=Паньков
VD1: library part vd0004, "=Описание", HelpURL=https://www.littelfuse.com/products/tvs-diodes/surface-mount/1_5smc.aspx, ID=vd0004, Корпус=DO-214AB, Наименование=1.5SMC62CA, Описание="Двунаправленная диодная сборка для подавления помех, 53 В", Производитель="Littelfuse, Inc.", Фамилия=Ларионов
VD2: library part vd0001, "=Описание", HelpURL=https://www.vishay.com/product?docid=88740, ID=vd0001, Импульсное обратное напряжение="30 В", Корпус=DO-214AC, Макс допустимый средний прямой ток="1,5 А", Наименование=SL13-E3/5AT, Описание="Диод Шоттки 30 В 1,5 А", Пиковое прямое напряжение="0,445 В", Производитель="Vishay Intertechnology, Inc.", Рабочие температуры="от -55 °С до +125 °С", Фамилия=Ларионов
VD3: library part vd0002, "=Описание", HelpURL=https://www.vishay.com/diodes/list/product-88986/, ID=vd0002, Импульсное обратное напряжение="40 В", Корпус=TO-277A, Макс допустимый средний прямой ток="3 А", Наименование=SS3P4L-M3/87A, Описание="Диод Шоттки 40 В 3 А", Пиковое прямое напряжение="0,47 В", Производитель="Vishay Intertechnology, Inc.", Рабочие температуры="от -55 °С до +150 °С", Фамилия=Ларионов
X1 X2: library part x0004, "=Описание", Contact_1=GND, Contact_2=GND, HelpURL=https://www.te.com/usa-en/product-4-1775099-0.html, ID=x0004, Наименование=4-1775099-0, Описание="ATX Power 4 pin гнездо прямой", Производитель="TE Connectivity", Фамилия=Ларионов
  X1: Contact_3=+12В, Contact_4=+12В
  X2: Contact_3=+5В, Contact_4=+5В

## Via types
v1: diameter 0.6, hole 0.3, Top Layer to Bottom Layer, tented both sides, 271 vias
v2: diameter 0.6, hole 0.3, Top Layer to Bottom Layer, tented top, 17 vias

## Nets (pads, with @x,y where several pads share a name; then routed paths per layer and width w, separated by ;. In a path a pad name is that pad's centre, name@x,y a point inside that pad or via, vN(x,y) a via of type N, cw(c..) or ccw(c..) an arc to the next point about the centre after c; other vN are vias at no path point)
5V_CONN_OUT: VD3.1 X2.3 X2.4 | length 2.4
  Top Layer w1: VD3.1 VD3.1@118.75,86.71
5V_OUT: C12.1 C13.1 L1.2 R10.2 R12.2 VD3.2 | length 21.8
  Top Layer w0.3: C12.1@105.1,90.2 C12.1@105.125,90.225
  Top Layer w0.5: R12.2 105.8,97.4 106.3,96.9 L1.2 ; C12.1@105.1,90.2 105.1,91.8 106.3,93 L1.2 ; C12.1@105.125,90.225 R10.2 ; L1.2@107.05,94.25 L1.2
12V_CONN_IN: C1.1 DD1.1 DD1.2 R1.2 VD1.1 X1.3 X1.4
12V_PROT: C3.1 C4.1 C5.1 C8.1 DD1.15 DD1.16 DD2.3 R5.2 R7.2 R8.2 VD2.1 | length 5.7
  Top Layer w0.3: VD2.1@73.2,90.7 VD2.1
  Top Layer w0.5: R8.2 VD2.1@73.2,90.7
  Top Layer w1: C3.1@86,89.375 C4.1@88.5,89.375
GND: C1.2 C3.2 C4.2 C5.2 C6.2 C7.2 C8.2 C10.2 C13.2 DD1.9 DD2.0 DD2.1 DD2.2 HL1.1 HL2.1 R6.1 R11.1 S1.2 VD1.2 VD2.2 X1.1 X1.2 X2.1 X2.2 | length 6
  Top Layer w0.5: 61.35,79.6 C6.2@61.35,81 ; DD1.9@70.95,83 70.95,82.05 73.55,79.45
  other v1: 52,72 54,72 56,72 58,72 60,72 62,72 64,72 66,72 68,72 70,72 72,72 74,72 76,72 78,72 80,72 82,72 84,72 86,72 88,72 90,72 92,72 94,72 96,72 98,72 100,72 102,72 104,72 106,72 108,72 110,72 112,72 114,72 116,72 118,72 120,72 53,74 55,74 57,74 59,74 61,74 65,74 67,74 69,74 71,74 75,74 77,74 79,74 85,74 87,74 89,74 91,74 93,74 95,74 97,74 99,74 101,74 103,74 105,74 107,74 109,74 111,74 113,74 115,74 117,74 119,74 121,74 52,76 54,76 56,76 58,76 60,76 62,76 64,76 66,76 68,76 70,76 72,76 74,76 76,76 78,76 80,76 84,76 86,76 88,76 90,76 92,76 94,76 96,76 98,76 100,76 102,76 104,76 106,76 108,76 110,76 112,76 114,76 116,76 118,76 120,76 57,78 59,78 61,78 75,78 77,78 79,78 85,78 87,78 89,78 91,78 93,78 95,78 97,78 99,78 101,78 103,78 105,78 107,78 109,78 111,78 113,78 115,78 117,78 119,78 121,78 52,80 78,80 80,80 82,80 84,80 86,80 88,80 90,80 92,80 94,80 96,80 98,80 100,80 102,80 104,80 106,80 108,80 110,80 112,80 114,80 116,80 118,80 120,80 53,82 55,82 57,82 79,82 85,82 87,82 89,82 91,82 93,82 95,82 97,82 99,82 101,82 103,82 105,82 107,82 109,82 111,82 113,82 115,82 117,82 119,82 52,84 88,84 96,84 102,84 104,84 106,84 108,84 110,84 87,86 95,86 97,86 101,86 108,88 67,90 69,90 79,90 81,90 83,90 68,92 80,92 82,92 84,92 90,92 92,92 94,92 96,92 98,92 104,92 108,92 57,94 63,94 65,94 67,94 69,94 71,94 73,94 75,94 77,94 79,94 81,94 83,94 85,94 87,94 89,94 91,94 93,94 95,94 97,94 103,94 115,94 62,96 64,96 68,96 70,96 72,96 74,96 76,96 78,96 80,96 82,96 84,96 86,96 88,96 90,96 92,96 94,96 96,96 98,96 104,96
  other v2: 96.2,86.5 95.2,87.5 96.2,87.5 97.2,87.5 95.2,88.5 96.2,88.5 97.2,88.5 95.2,89.5 96.2,89.5 97.2,89.5 96.2,90.5
NetC2_1: C2.1 DD1.12 | length 2.7
  Top Layer w0.3: DD1.12 70.975,85.2 71.9,85.2 72.6,84.5 73.3,84.5 C2.1@73.35,84.55
NetC2_2: C2.2 DD1.0 DD1.6 DD1.8 R3.1 R4.1
  other v1: 59,80.5 65,80.5 67,80.5 69,80.5 71,80.5 75,80.5 76.5,80.5 73.5,81.5 59,82 65,82 67,82 69,82 76.5,82 59,83.5 67,83.5 69,83.5 76.5,83.5 59,85 76.5,85 72.5,86 74,86 75.5,86 67.5,87.5 68.5,87.5
  other v2: 67,85 68,85 69,85 67,86 68,86 69,86
NetC6_1: C6.1 DD1.7 S1.1 | length 17
  Top Layer w0.3: C6.1@62.75,81 63.4,81 ; DD1.7 65.025,83.9 64.1,83.9 63.8,83.6 63.8,81.4 63.4,81 ; S1.1@72.55,78.24 63.45,78.24 63.8,78.59 63.8,80.6 63.4,81
NetC7_1: C7.1 DD2.6 | length 4.3
  Top Layer w0.3: C7.1@92.8,83.85 92.8,85.119 92.1,85.819 92.1,86.574 92.498,86.971 93.221,86.971 DD2.6
NetC9_1: C9.1 DD2.11 | length 2.6
  Top Layer w0.3: DD2.11 100.5,88.3 100.7,88.5 101.2,88.5 C9.1@101.5,88.8
NetC9_2: C9.2 DD2.12 DD2.13 L1.1 R9.1 | length 1.8
  Top Layer w0.3: C9.2@101.5,90.2 C9.2@101.525,90.225
  Top Layer w0.5: C9.2@101.525,90.225 R9.1
NetC10_1: C10.1 DD2.8 DD2.10 | length 7.9
  Top Layer w0.3: DD2.8 99.15,85.45 99.2,85.4 99.2,85.381 99.6,84.981 v1(99.6,84.9) C10.1@99.6,83.85 ; DD2.10@99.2,87.6 DD2.10 99.175,87.675 100.625,87.675 v1(100.7,87.6)
  Bottom Layer w0.3: v1(99.6,84.9) 99.6,87.2 100.05,87.65 v1@100.65,87.65
NetC11_1: C11.1 C12.2 R9.2 | length 3.6
  Top Layer w0.3: C11.1@103.3,86.9 R9.2 104.975,88.675 C12.2@105.1,88.8
NetC11_2: C11.2 DD2.9 R10.1 R11.2 | length 12.5
  Top Layer w0.3: DD2.9 100.378,87 100.578,86.8 v1(100.659,86.8) ; C11.2@103.3,85.5 104.8,85.5 105.1,85.8 v1(105.1,86.8) 105.157,86.857 106.782,86.857 106.9,86.975 R10.1
  Bottom Layer w0.3: v1(100.659,86.8) v1(105.1,86.8)
NetDD1_3: DD1.3 R1.1 R2.2 | length 5.2
  Top Layer w0.2: DD1.3@65.025,86.5 DD1.3
  Top Layer w0.3: R2.2 61.2,84.525 61.2,84.9 61.7,85.4 61.95,85.4 62.4,85.4 62.8,85.8 62.8,86.175 R1.1 63.8,86.2 64.1,86.5 DD1.3@65.025,86.5
NetDD1_5: DD1.5 R2.1 R3.2 | length 4.3
  Top Layer w0.3: R3.2 R2.1 63.4,84.5 64.1,85.2 65.025,85.2 DD1.5
NetDD1_11: DD1.11 R4.2 | length 3.7
  Top Layer w0.3: DD1.11 70.979,84.496 71.896,84.496 72.2,84.193 72.2,83 72.4,82.8 R4.2
NetDD2_4: DD2.4 R5.1 R6.2 | length 7.5
  Top Layer w0.3: R6.2 R5.1 91.4,85.6 v1(91.9,85.1) ; v1(91.9,88) 91.981,88 92.252,88.271 93.221,88.271 DD2.4
  Bottom Layer w0.3: v1@91.8,85.1 91.9,85.2 v1(91.9,88)
NetDD2_5: DD2.5 R7.1 | length 2.6
  Top Layer w0.3: R7.1 90.825,87.35 92.169,87.35 92.441,87.621 93.221,87.621 DD2.5
NetHL1_2: HL1.2 R8.1 | length 8.2
  Top Layer w0.3: v1(65.7,97.4) HL1.2 ; v1(65.8,93) 65.8,90.725 R8.1
  Bottom Layer w0.3: v1(65.7,97.4) 65.75,97.35 65.75,93.05 v1(65.8,93)
NetHL2_2: HL2.2 R12.1 | length 2.8
  Top Layer w0.3: HL2.2 R12.1
pads on no net: DD1.4 DD1.10 DD1.13 DD1.14 DD2.7 DD2.14

## Polygon pours and split planes (outlines as drawn)
GND on Top Layer "Top Layer-GND" (solid, pour order 32): 51,99 121.5,99 121.5,71 51,71
5V_OUT on Top Layer "Top Layer-5V_OUT" (solid, pour order 28): 114,82.6 114,87.5 111,87.5 111,96.6 106.6,96.6 106.6,93.4 109,93.4 109,86 112.4,82.6
no net on Top Layer "Top Layer-No Net" (solid, pour order 16): 104.95,96.45 105,96.5
NetC9_2 on Top Layer "Top Layer-NetC9_2" (solid, pour order 10): 99.6,88.7 99.6,95 101.9,95 101.9,88.7
12V_PROT on Top Layer "Top Layer-12V_PROT" (solid, pour order 8): 88.3,86.975 88.3,85.1 90,85.1 90,86.5 92,88.5 94,88.5 94,89.5 92.5,89.5 92,90 90,90 90,90.2 84,90.2 84,88.5 74.5,88.5 74.5,90 72,90 72,88.5 71.5,88.5 71.5,86.6 76.999,86.562 76.999,83.5 86,83.5 86,86.5 86.8,88.4 87.7,88.4
NetC2_2 on Top Layer "Top Layer-NetC2_2" (solid, pour order 2): 58,85.8 58,80 77,80 77,86.5 69.5,86.5 69.5,88 66.5,88 66.5,86.5
12V_CONN_IN on Top Layer "Top Layer-12V_CONN_IN" (solid, pour order 0): 60.4,89.5 61.4,90.5 64.5,90.5 64.5,88.5 66,88.5 66,86.8 62.4,86.8 62.4,88 61.9,88 61.9,86.8 61.6,86.8 61.6,85.8 51.5,85.8 51.5,98 56,98 56,89.5
5V_CONN_OUT on Top Layer "Top Layer-5V_CONN_OUT" (solid, pour order 30): 116,97.5 121,97.5 121,82.5 116,82.5
no net on Top Layer "Top Layer-No Net 1" (solid, pour order 26): 104.7,93.5
GND on Bottom Layer "Bottom Layer-GND" (solid, pour order 22): 51,99 121.5,99 121.5,71 51,71
NetC2_2 on Bottom Layer "Bottom Layer-NetC2_2" (solid, pour order 4): 58,79.5 77,79.5 77,88 58,88
no net on Top Solder (solid): 98.4,90.6 100,90.6 100,85.9 98.4,85.9
no net on Top Solder (solid): 92.5,90.6 94,90.6 94,86 92.5,86
no net on Top Solder (solid): 70.2,82.9 71.7,82.9 71.7,88.1 70.2,88.1
no net on Top Solder (solid): 70.3,87.9
no net on Top Solder (solid): 64.3,88 65.8,88 65.8,82.9 64.3,82.9

## Silkscreen, mask and mechanical layers (free items; w line width, h text height)
Top Overlay:
  lines w0.05: 86.625,93.475 86.625,93.5
  lines w0.2: 86.625,93.5 86.625,95.375 83.925,95.375 ; 87.15,92.95 86.625,93.475 83.925,93.475 ; 91.45,83.1 90.825,82.475 ; 107.6,84.8 109.5,82.9 ; 114.4,74.6 114.4,76.6 114.8,76.6 114.8,79.2 115.8,79.2 116.7,78.3 116.7,76.6 116.7,74.6 ; 114.4,75.6 116.7,75.6 ; 117.7,74.6 117.7,76.6 117.7,78.3 118.6,79.2 119.6,79.2 119.6,77 120,76.6 120,74.6 ; 117.7,75.6 120,75.6 ; 81.225,93.475 81.225,95.375 ; 81.225,93.475 83.925,93.475 ; 81.225,93.475 81.225,95.375 ; 81.225,93.475 78.525,93.475 78.525,95.375 81.225,95.375 ; 81.225,95.375 83.925,95.375 ; 83.925,93.475 83.925,95.375 ; 83.925,93.475 83.925,95.375 ; 88.125,78.675 88.125,76.775 90.825,76.775 90.825,78.675 ; 88.125,78.675 90.825,78.675 ; 88.125,78.675 88.125,80.575 ; 88.125,78.675 90.825,78.675 ; 88.125,80.575 90.825,80.575 ; 88.125,80.575 88.125,82.475 90.825,82.475 ; 88.125,80.575 90.825,80.575 ; 90.825,78.675 90.825,80.575 ; 90.825,80.575 90.825,82.475 ; 103.75,80.9 103.75,82.8 ; 103.75,80.9 103.75,82.8 ; 103.75,80.9 101.05,80.9 101.05,82.8 103.75,82.8 ; 103.75,80.9 103.75,82.8 ; 103.75,80.9 106.45,80.9 ; 103.75,82.8 106.45,82.8 ; 106.45,80.9 109.15,80.9 ; 106.45,80.9 106.45,79 109.15,79 ; 106.45,80.9 106.45,82.8 ; 106.45,80.9 106.45,82.8 ; 106.45,80.9 109.15,80.9 ; 106.45,82.8 109.15,82.8 ; 109.15,79 109.15,80.9 ; 109.15,79 111.85,79 111.85,80.9 ; 109.15,79 109.15,80.9 ; 109.15,80.9 111.85,80.9 ; 109.15,80.9 109.15,82.8 ; 109.15,80.9 109.15,82.8 ; 109.15,80.9 111.85,80.9 ; 109.15,82.8 111.85,82.8 111.85,80.9 ; 65.7,95.9 70.3,95.9 70.3,98.9 65.7,98.9 65.7,95.9 ; 87.3,95.9 87.3,98.9 91.9,98.9 91.9,95.9 87.3,95.9
  lines w0.5: 114,78 114,80 118.501,80
  text "PWR IN" at 71,96.5 h2
  text "PWR OUT" at 79.6,96.5 h2
  text "SHDN" at 55,73 h2
  text "Buck / 12V-5V, 2A" at 95,73 h3
  text ".designation" at 106.5,71 h2
Bottom Overlay:
  text "V IN 12V" at 58.5,84 h2
  text "V OUT 5V" at 120,84 h2
  text ".pcb_dec_number" at 122.5,71 h2
Board:
  the board outline again, w0.1
Assembly Notes (Mech5):
  text "'.title'" at 50.4,67 h2
  text "'.project'_'.pcb_dec_number'['.Pcb_File_Name_No_Path']" at 50.4,64.5 h2